# Altium PCB RS-485-USB.PcbDoc
Units mil, origin at the board's own origin, x right, y up, seen from the top; angles counter-clockwise.
Board outline 1275 x 1345 mil, 2 copper layers (Top Layer, Bottom Layer); 21 components, 30 nets, 140 pads, 48 vias.
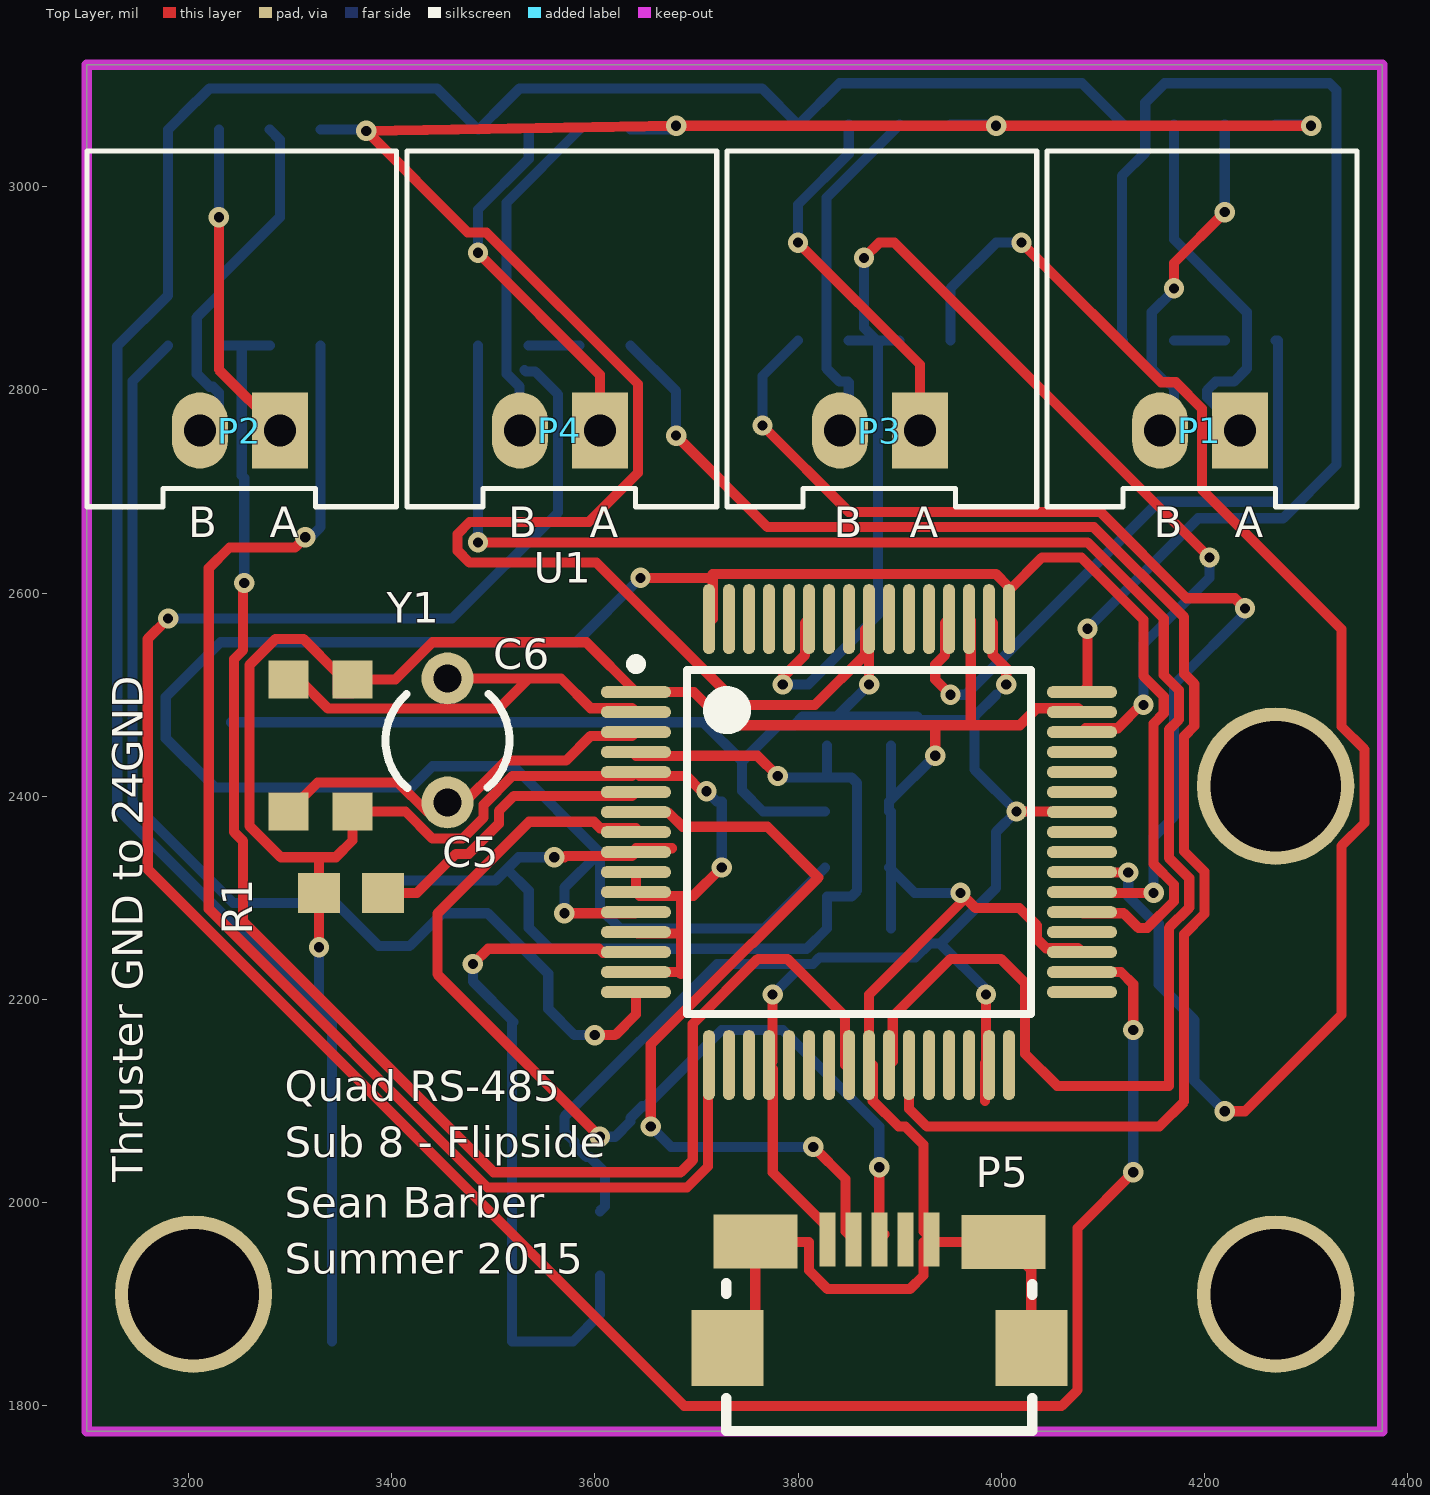
[diagram p0: Top Layer view]
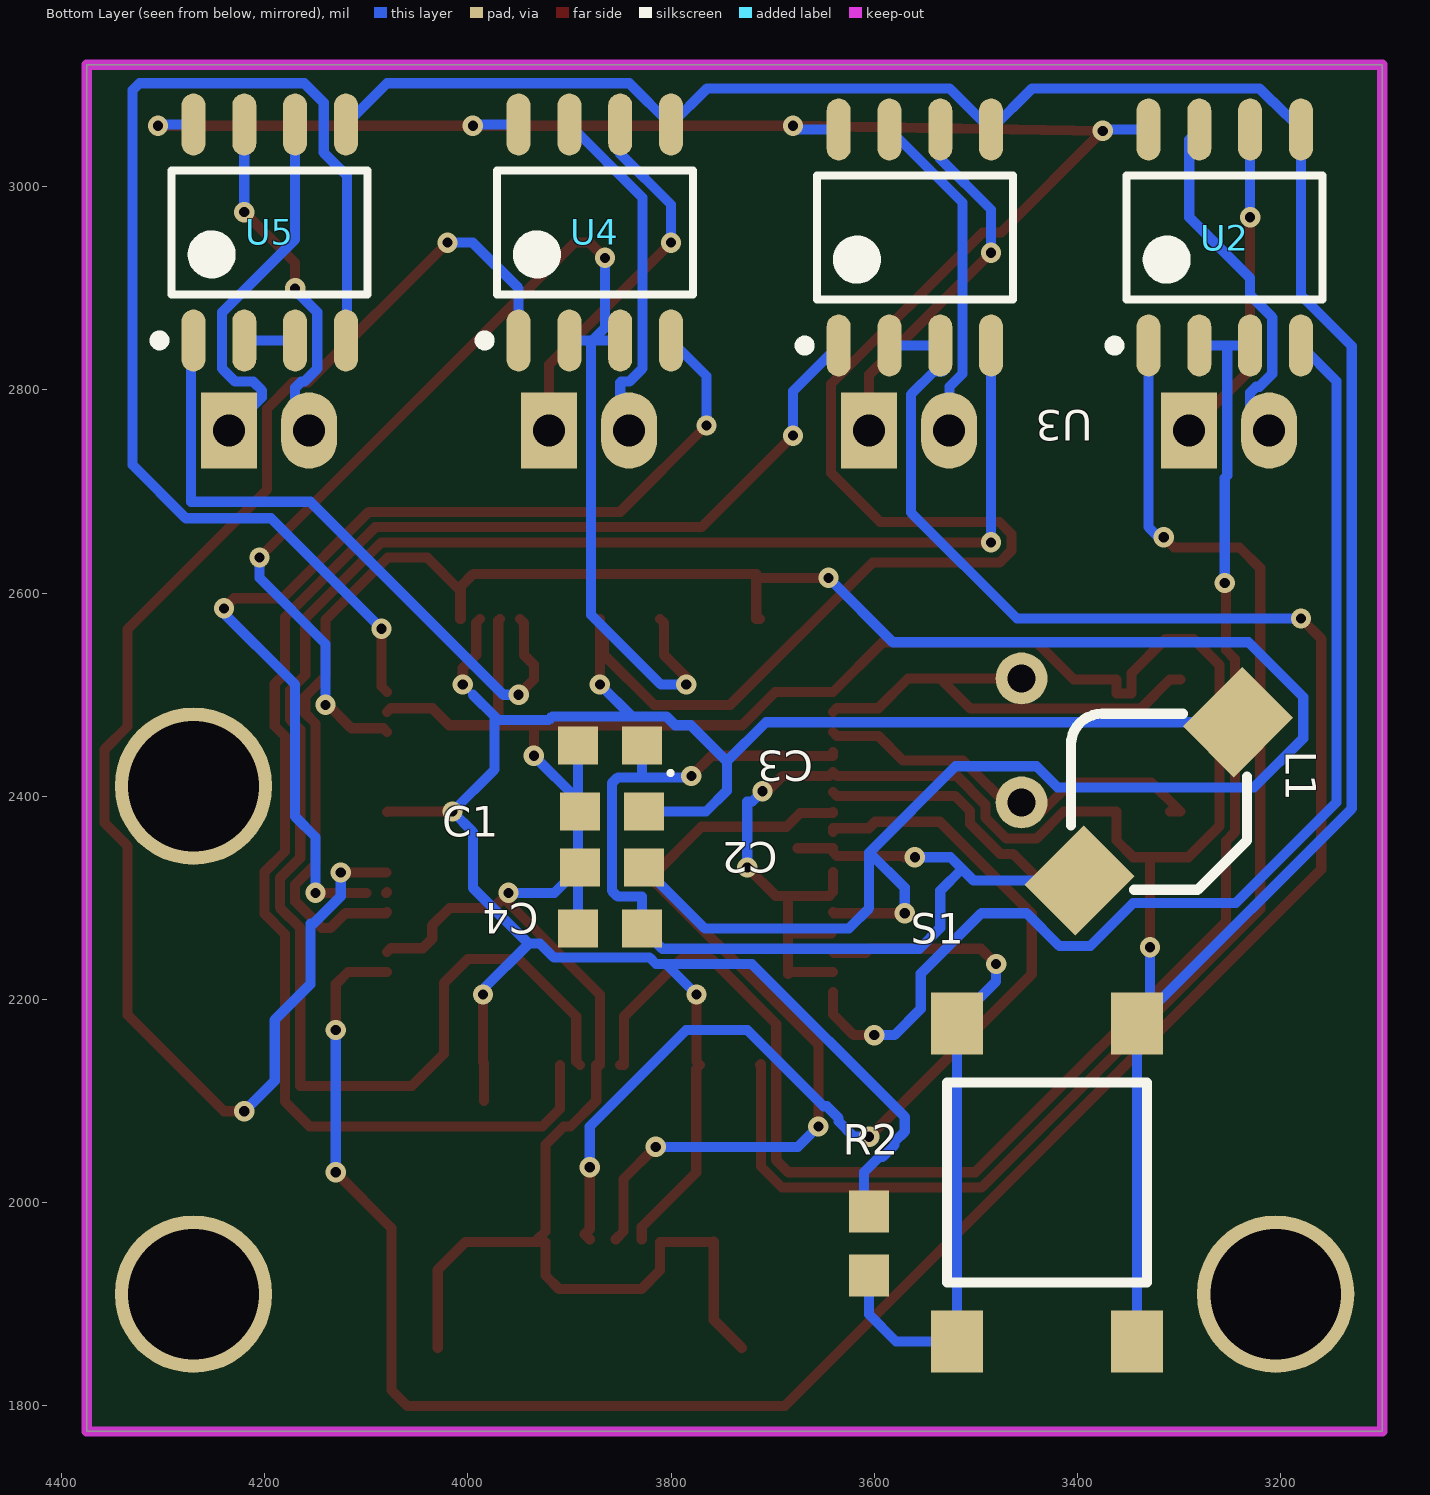
[diagram p1: Bottom Layer view, seen from below]
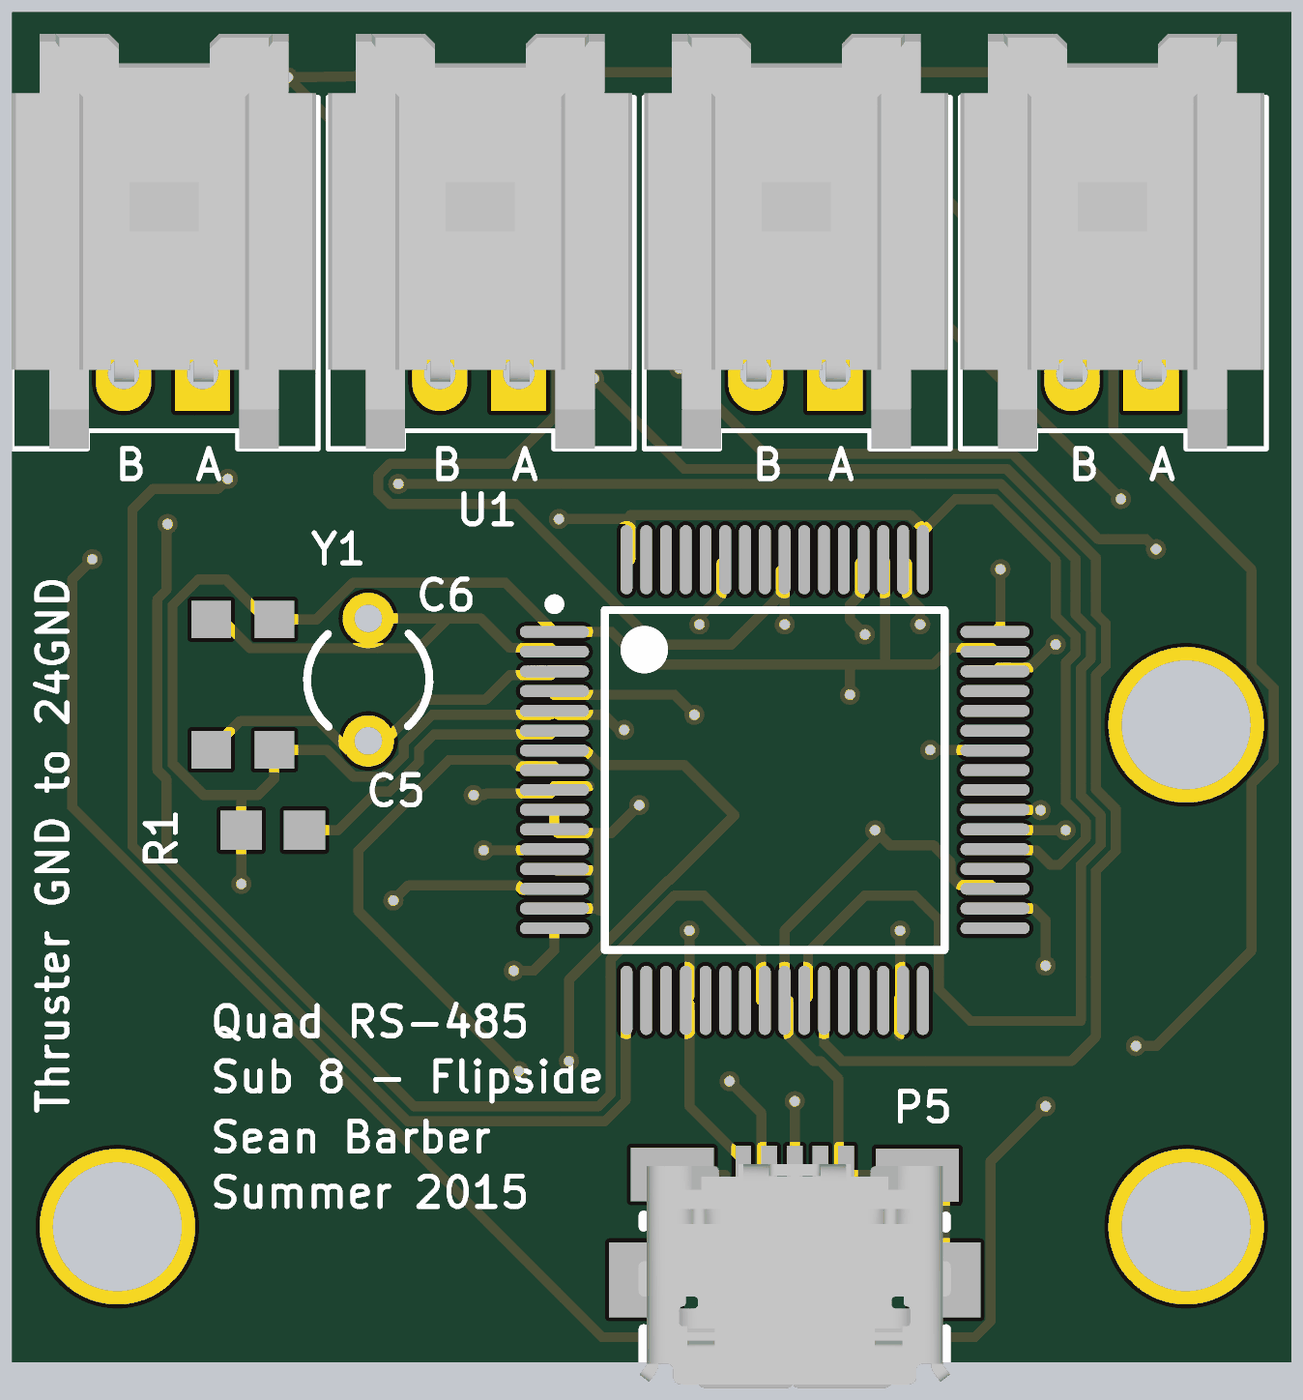
[diagram p2: 3D render of the assembled board from above, using the file's embedded part models]

## Layer stack, top to bottom
Top Solder: solder mask 0.4, Solder Resist, Dk 3.5
Top Layer: signal copper 1.4
Dielectric 1: dielectric 12.6, FR-4, Dk 4.8
Bottom Layer: signal copper 1.4
Bottom Solder: solder mask 0.4, Solder Resist, Dk 3.5

## Board outline
3100,1775 3100,3120 4375,3120 4375,1775

## Design rules (kind name [scope] priority, off if disabled: settings)
Clearance [All] p1: gap=5
MinimumSolderMaskSliver [All] p1: minsoldermaskwidth=1
PolygonConnect [All] p1: connectstyle=Relief reliefconductorwidth=10 reliefentries=4 polygonreliefangle="90 Angle" airgapwidth=10
RoutingVias [All] p1: holewidth=28 width=50 viastyle="Through Hole" minholewidth=28 minwidth=50 maxholewidth=28 maxwidth=50
SilkToSolderMaskClearance [IsPad] p1: minsilkscreentomaskgap=3 clearancetoexposedcopper=TRUE
SolderMaskExpansion [All] p1: expansion=4
Width [All] p1: maxlimit=10 minlimit=10 preferedwidth=10
28 further rules are at their usual default settings.

## Components (designator, comment, footprint, x,y, rotation, side; value= is the part's Value field where it differs from the comment)
C1 "Cap" CAPC0603 3858.19,2385 r180 bottom
C2 "Cap" CAPC0603 3858.19,2330 r180 bottom
C3 "CapPol" CAPP0603 3860,2450 r0 bottom
C4 "Cap" CAPC0603 3860,2270 r180 bottom
C5 "Cap" CAPC0603 3330,2385 r0 top
C6 "Cap" CAPC0603 3330,2515 r0 top
L1 "Inductor" CDPH4D19F 3320,2395 r270 bottom
P1 "2-pin Horz Sherlock" MOLEX-HDR-1X2-SHERLOCK-HORZ 4235,2760 r0 top
P2 "2-pin Horz Sherlock" MOLEX-HDR-1X2-SHERLOCK-HORZ 3290,2760 r0 top
P3 "2-pin Horz Sherlock" MOLEX-HDR-1X2-SHERLOCK-HORZ 3920,2760 r0 top
P4 "2-pin Horz Sherlock" MOLEX-HDR-1X2-SHERLOCK-HORZ 3605,2760 r0 top
P5 "USB Micro" 10118192-0001LF 3880,1985 r0 top
R1 "Res" RES0603 3360,2305 r0 top
R2 "Res" RES0603 3605,1960 r270 bottom
S1 "Button" PTS645xxxxSMTR92 3430,2020 r270 bottom
U1 "FT4232H" FT4232HL 3860,2355 r0 top
U2 "SP3485" SP3485 3255,2950 r90 bottom
U3 "SP3485" SP3485 3560,2950 r90 bottom
U4 "SP3485" SP3485 3875,2955 r90 bottom
U5 "SP3485" SP3485 4195,2955 r90 bottom
Y1 "12MHz" R38 3455,2455 r0 top

## Footprints (in the part's own frame and the unit in brackets; to place one, negate y for a bottom-side part, rotate by r counter-clockwise, add the part's x,y. Pads: shape width x height; smd on the part's side, far side on the other; paste and mask are expansions set on the pad)
10118192-0001LF [mm] "USB Micro-B Recepticle"
  rect 0.4x1.35 smd: 1(-1.3,-0.533) 2(-0.65,-0.533) 3(0,-0.533) 4(0.65,-0.533) 5(1.3,-0.533)
  rect 1.8x1.9 smd: SHD(-3.8,-3.248) SHD(3.8,-3.248)
  rect 2.1x1.35 smd: SHD(-3.1,-0.584) SHD(3.1,-0.598)
  silkscreen extent -3.82,-5.33 3.82,-1.63, body extent -3.96,-5.98 3.96,-0.32, height 3.09
CAPC0603 [mm] "Chip Capacitor, 2-Leads, Body 1.60x0.80mm, IPC Medium Density"
  rect 1x0.95 smd: 1(-0.8,0) 2(0.8,0)
  body extent -0.88,-0.48 0.87,0.48, height 0.8
CAPP0603 [mm] "Chip Capacitor, 2-Leads, Body 1.60x0.80mm, IPC Medium Density"
  rect 1x0.95 smd: 1(-0.8,0) 2(0.8,0)
  silkscreen extent -1.56,0.64 -1.46,0.74, body extent -0.88,-0.48 0.87,0.48, height 0.8
CDPH4D19F [mm] "SMD Power Inductor"
  rect 1.8x2.1 smd rot 45: 1(-1.98,1.98) 2(1.98,-1.98)
  silkscreen extent -2.19,-2.19 2.21,2.21, body extent -2.45,-2.45 2.45,2.45, height 2
FT4232HL [mm] "TSQFP, 64-Leads, Body 10.00x10.00mm, Pitch 0.50mm, IPC Medium Density"
  oval 1.75x0.3 smd: 1(-5.575,3.75) 2(-5.575,3.25) 3(-5.575,2.75) 4(-5.575,2.25) 5(-5.575,1.75) 6(-5.575,1.25) 7(-5.575,0.75) 8(-5.575,0.25) 9(-5.575,-0.25) 10(-5.575,-0.75) 11(-5.575,-1.25) 12(-5.575,-1.75) 13(-5.575,-2.25) 14(-5.575,-2.75) 15(-5.575,-3.25) 16(-5.575,-3.75) 33(5.575,-3.75) 34(5.575,-3.25) 35(5.575,-2.75) 36(5.575,-2.25) 37(5.575,-1.75) 38(5.575,-1.25) 39(5.575,-0.75) 40(5.575,-0.25) 41(5.575,0.25) 42(5.575,0.75) 43(5.575,1.25) 44(5.575,1.75) 45(5.575,2.25) 46(5.575,2.75) 47(5.575,3.25) 48(5.575,3.75)
  oval 0.3x1.75 smd: 17(-3.75,-5.575) 18(-3.25,-5.575) 19(-2.75,-5.575) 20(-2.25,-5.575) 21(-1.75,-5.575) 22(-1.25,-5.575) 23(-0.75,-5.575) 24(-0.25,-5.575) 25(0.25,-5.575) 26(0.75,-5.575) 27(1.25,-5.575) 28(1.75,-5.575) 29(2.25,-5.575) 30(2.75,-5.575) 31(3.25,-5.575) 32(3.75,-5.575) 49(3.75,5.575) 50(3.25,5.575) 51(2.75,5.575) 52(2.25,5.575) 53(1.75,5.575) 54(1.25,5.575) 55(0.75,5.575) 56(0.25,5.575) 57(-0.25,5.575) 58(-0.75,5.575) 59(-1.25,5.575) 60(-1.75,5.575) 61(-2.25,5.575) 62(-2.75,5.575) 63(-3.25,5.575) 64(-3.75,5.575)
  silkscreen extent -5.7,-4.3 4.3,4.57, body extent -5,-5 5,5, height 1.6
MOLEX-HDR-1X2-SHERLOCK-HORZ [mm]
  rect 1.397x1.905 hole 0.8: 1(0,0)
  oval 1.397x1.905 hole 0.8: 2(-2,0)
  silkscreen extent -4.83,-1.91 2.92,6.98, body extent -4.83,-1.91 2.87,8.59, height 5.54
PTS645xxxxSMTR92 [mm] "PTS645 Series SMT 6 mm Tactile Switch"
  rect 1.555x1.3 smd: A(-3.975,2.25) A(3.975,2.25) B(-3.975,-2.25) B(3.975,-2.25)
  silkscreen extent -2.5,-2.5 2.5,2.5, body extent -3,-3 3,3, height 4.5
R38 [mm] "Crystal, Thru-Hole; 2 Leads; Body 3.1 x 8.2 mm (Dia.xH)"
  round 1.3 hole 0.7: 1(0,1.55) 2(0,-1.55)
  silkscreen extent -1.55,-1.19 1.55,1.17
RES0603 [mm] "Chip Resistor, 2-Leads, Body 1.60x0.80mm, IPC Medium Density"
  rect 1.05x1 smd: 1(-0.8,0) 2(0.8,0)
  body extent -0.88,-0.48 0.87,0.47, height 0.8
SP3485 [mm] "SOIC, 8-Leads, Body 4.90x3.90mm, Pitch 1.27mm, IPC Medium Density"
  oval 1.55x0.6 smd: 1(-2.7,1.905) 2(-2.7,0.635) 3(-2.7,-0.635) 4(-2.7,-1.905) 5(2.7,-1.905) 6(2.7,-0.635) 7(2.7,0.635) 8(2.7,1.905)
  silkscreen extent -2.82,-2.45 1.55,2.88, body extent -1.95,-2.45 1.95,2.45, height 1.75

## Part data
P1 P2 P3 P4: library part MOLEX-HDR-1x2-SHERLOCK_RA, "Header, Molex, 2mm Pitch Sherlock Header, Single Row, Horizontal, 2 Circuits, Length 3.3mm,  0353630260"
P5: "USB Mini B Metal Shield SMT"
S1: "SPST Button"
U1: "Quad High Speed USB to Multipurpose UART/MPSSE"
U2 U3 U4 U5: "IC TXRX RS485 HALF DUPLEX 8NSOIC"
Y1: library part XTAL, "Crystal Oscillator"

## Free pads (board coordinates)
  round 155 hole 128.5: 0(3205,1910) 0(4270,1910) 0(4270,2410)

## Via types
v1: diameter 20, hole 10, Top Layer to Bottom Layer, tented both sides, 48 vias

## Nets (pads, with @x,y where several pads share a name; then routed paths per layer and width w, separated by ;. In a path a pad name is that pad's centre, name@x,y a point inside that pad or via, vN(x,y) a via of type N, cw(c..) or ccw(c..) an arc to the next point about the centre after c; other vN are vias at no path point)
3V3: C1.2 L1.1 P5.1 R2.1 U1.20 U1.31 U1.42 U1.50 U1.56 U2.8 U3.8 U4.8 U5.8 | length 4750.5
  Top Layer w10: v1(3775,2205) 3775,2139.09 U1.20 3775.2,2131.73 3775.2,2029.8 3828.82,1976.18 P5.1 ; v1(3870,2510) U1.56@3870,2574.33 ; U1.56@3870,2560 3866.06,2563.94 3866.06,2539.36 3816.71,2490 3741.72,2490 3601.72,2630 3476.72,2630 3465,2641.72 3465,2658.28 3476.72,2670 3594.14,2670 3642.5,2718.36 3642.5,2805.78 3493.28,2955 3475,2955 v1(3375,3055) v1(3680,3060) v1@4300,3060 ; 3984.17,2100.38 3984.17,2137.64 3985,2138.46 v1(3985,2205) ; U1.50 3991.73,2570.71 3991.73,2539.36 4005,2526.09 v1(4005,2510) ; v1(4015,2385) 4079.02,2385 U1.42
  Bottom Layer w10: L1.1 3706.55,2472.95 3745,2434.5 ; U2.8 v1@3371.3,3056.3 ; R2.1 3610,1996.5 3610,2030 3595,2045 3591.72,2045 3580,2056.72 3580,2060 3570,2070 3570,2084.5 3720.5,2235 3805,2235 ; U3.8 v1@3678.7,3056.3 ; v1(3775,2205) 3805,2235 ; C1.2 3765.5,2385 3745,2405.5 3745,2434.5 ; v1(3870,2510) 3838.7,2478.7 ; U4.8 v1@3993.7,3061.3 ; v1(3985,2205) 3985,2210 3940,2255 ; 3995,2500 3973.7,2478.7 ; U5.8 v1@4303.7,3061.3 ; 3745,2434.5 3780.5,2470 3795.98,2470 3804.68,2478.7 3838.7,2478.7 ; 3805,2235 3814.72,2235 3821.02,2241.3 3915.32,2241.3 3929.02,2255 3940,2255 ; 3838.7,2478.7 3916.8,2478.7 3920.5,2475 3970,2475 3973.7,2478.7 ; 3940,2255 3995,2310 3995,2365 v1(4015,2385) 3973.7,2426.3 3973.7,2478.7
  other v1: 3995,3060 4305,3060
GND: C1.1 C2.1 C3.2 C4.1 C5.2 C6.2 P5.5 P5.SHD R1.1 S1.A U1.1 U1.5 U1.10 U1.11 U1.13 U1.15 U1.25 U1.35 U1.47 U1.51 U2.5 U3.5 U4.5 U5.5 | length 6072.6
  Top Layer w10: v1(3328.5,2251.5) R1.1 3328.5,2340 ; U1.15 3682.95,2227.05 3684.96,2225.04 3684.96,2265.04 ; U1.10 U1.11 3644.29,2302.01 3684.96,2302.01 ; U1.13@3641.89,2265.04 3684.96,2265.04 ; v1(3710,2405) 3705,2405 3689.88,2420.12 3644.29,2420.12 U1.5 3636.73,2420.12 3518.9,2420.12 3490.59,2391.8 3490.59,2379.23 3469.74,2358.39 3440.26,2358.39 3413.64,2385 C5.2 3361.5,2356.5 3345,2340 3290.98,2340 3260,2370.98 3260,2529.02 3285.98,2555 3313.02,2555 3346.81,2521.21 3346.81,2501.3 3361.5,2501.3 C6.2 3403.64,2515 3440.26,2551.61 3591.54,2551.61 U1.1 3697.36,2502.64 3730,2470 3968.27,2470 ; v1(3725,2330) 3697.01,2302.01 3684.96,2302.01 ; P5.SHD@3730.39,1857.11 3757.95,1884.67 3757.95,1962 3758.51,1961.44 3810.94,1961.44 3810.94,1933.28 3829.23,1915 3910,1915 3923.46,1928.46 3923.46,1961.44 4002.05,1961.44 4029.61,1933.88 P5.SHD@4029.61,1857.11 ; P5.5 3923.46,1971.72 3923.46,2057.11 3905.57,2075 3899,2075 3873.62,2100.38 3873.62,2135.51 U1.25 3869.84,2204.84 3960,2295 v1(3960,2305) 3975,2290 4018.05,2290 4035.04,2273.01 4035.04,2259.83 4044.36,2250.51 4075.71,2250.51 U1.35 ; v1(3935,2440) 3935,2470 ; U1.51 3970,2572.76 3970,2471.73 3968.27,2470 ; U1.47 4075.71,2486.73 4035.04,2486.73 4018.31,2470 3968.27,2470 ; 3684.96,2265.04 3684.96,2302.01
  Bottom Layer w10: v1(3328.5,2251.5) S1.A@3328.5,2189.41 ; S1.A@3341.42,1863.5 3341.42,2176.5 S1.A@3328.5,2189.41 ; v1(3710,2405) 3720,2395 3725,2395 v1(3725,2330) ; C2.1 3914.69,2305 v1(3960,2305) ; C1.1 3889.69,2394.69 C1.1@3891.5,2396.5 ; C4.1 C1.1@3891.5,2385 ; C3.2 C1.1@3891.5,2396.5 ; v1(3935,2440) C1.1@3891.5,2396.5 ; U5.5 4079.49,3101.81 3840.97,3101.81 3800.45,3061.3 U4.5 3764.49,3096.81 3525.97,3096.81 3513.19,3084.04 3485.45,3056.3 U3.5 3444.49,3096.81 3220.97,3096.81 3208.19,3084.04 3207.74,3084.04 U2.5 3180,2893.25 3130,2843.25 3130,2387.92 S1.A@3328.5,2189.41
MOLEX1-1: P2.1 U2.6 | length 321.2
  Top Layer w10: v1(3230,2970) 3230,2820 P2.1
  Bottom Layer w10: v1(3230,2970) U2.6
MOLEX1-2: P2.2 U2.7 | length 352.9
  Bottom Layer w10: P2.2 3230,2778.74 3230,2797.22 3224.03,2803.19 3220.97,2803.19 3208.19,2815.96 3208.19,2871.44 3230,2893.25 3230,2910 3290,2970 3290,3046.3 U2.7
MOLEX2-1: P4.1 U3.6 | length 369.3
  Top Layer w10: v1(3485,2935) 3605,2815 P4.1
  Bottom Layer w10: v1(3485,2935) 3485,2977.51 3535,3027.51 U3.6 ; P4.1 P4.1@3606.81,2761.81
MOLEX2-2: P4.2 U3.7 | length 343.4
  Bottom Layer w10: P4.2@3525.97,2760.29 3525.97,2803.19 3513.19,2815.96 3513.19,2984.49 U3.7 ; P4.2 P4.2@3535,2768.74
MOLEX3-1: P3.1 U4.6 | length 374.3
  Top Layer w10: v1(3800,2945) 3920,2825 P3.1
  Bottom Layer w10: v1(3800,2945) 3800,2982.51 3850,3032.51 U4.6 ; P3.1 P3.1@3921.81,2761.81
MOLEX3-2: P3.2 U4.7 | length 348.4
  Bottom Layer w10: P3.2 3850,2768.74 3850,2807.22 3849.03,2808.19 3840.97,2808.19 3828.19,2820.96 3828.19,2989.49 U4.7
MOLEX4-1: P1.1 U5.6 | length 380.9
  Bottom Layer w10: U5.6 4170,2948.25 4241.81,2876.44 4241.81,2820.96 4229.03,2808.19 4211.12,2808.19 4202.5,2799.57 4202.5,2792.5 P1.1 P1.1@4241.81,2766.81
MOLEX4-2: P1.2 U5.7 | length 345.8
  Top Layer w10: v1(4170,2900) 4170,2925 v1(4220,2975)
  Bottom Layer w10: P1.2 4170,2773.74 4170,2802.22 4164.03,2808.19 4160.97,2808.19 4148.19,2820.96 4148.19,2876.44 v1@4170,2898.25 ; v1(4220,2975) U5.7
NetC2_2: C2.2 U1.12 U1.37 U1.49 U1.64 | length 2551.1
  Top Layer w10: v1(3570,2285) 3639.41,2285 U1.12 ; v1(3645,2615) 3712.21,2615 ; U1.64 3716.14,2574.49 3716.14,2618.94 3994.54,2618.94 4006.73,2606.75 4006.73,2574.49 U1.49 4007.64,2602.64 4040,2635 4078.79,2635 4140,2573.79 4140,2518.28 4160,2498.28 4160,2481.72 4150,2471.72 4150,2333.28 4170,2313.28 4170,2296.72 4143.79,2270.5 4135,2270.5 4120.5,2285 4080.59,2285 U1.37
  Bottom Layer w10: v1(3570,2285) 3570,2310 3604.75,2344.75 ; v1(3645,2615) 3581.61,2551.61 3231.61,2551.61 3177.77,2497.77 3177.77,2457.23 3226.34,2408.66 3419.35,2408.66 3440.26,2429.57 3519.93,2429.57 3605,2344.5 3605,2290 3625,2270 3766.69,2270 C2.2
NetC3_1: C3.1 C4.2 L1.2 U1.4 U1.9 | length 1178.4
  Top Layer w10: 3570,2340 3571.38,2341.38 3636.73,2341.38 U1.9 U1.9@3640.51,2348.94 ; U1.4 U1.4@3640.51,2439.8 ; v1(3780,2420) 3760,2440 3690.5,2440 3690.31,2439.8 ; U1.9@3640.51,2348.94 3675.64,2348.94 U1.9@3640.51,2348.94 ; U1.4@3640.51,2439.8 3690.31,2439.8 ; U1.4@3640.51,2439.8 3690.31,2439.8
  Bottom Layer w10: L1.2 3502.05,2317.05 3525,2340 v1(3560,2340) ; 3513.53,2328.53 3535,2307.05 3535,2270.5 3555.5,2250 3584.5,2250 3808.5,2250 C4.2 3828.5,2301.3 3852.33,2301.3 3858.19,2307.16 3858.19,2412.84 3852.33,2418.7 3828.5,2418.7 ; v1(3780,2420) 3781.3,2418.7 3828.5,2418.7 ; C3.1 3828.5,2418.7
NetC5_1: C5.1 U1.3 Y1.2 | length 507.3
  Top Layer w10: C5.1@3308.97,2385 C5.1 3327.2,2413.7 3406.16,2413.7 Y1.2@3434.86,2385 ; U1.3 3636.73,2459.49 3596.06,2459.49 3571.69,2435.12 3512.69,2435.12 ; Y1.2@3434.86,2385 Y1.2@3462.57,2385 ; Y1.2@3434.86,2385 3455,2385 Y1.2@3462.57,2385 ; Y1.2@3462.57,2385 3512.69,2435.12 ; Y1.2@3462.57,2385 3463.28,2385.7 3512.69,2435.12
NetC6_1: C6.1 U1.2 Y1.1 | length 627.5
  Top Layer w10: C6.1 3308.97,2515 3337.67,2486.3 ; Y1.1 3535,2516.02 ; U1.2 3636.73,2486.73 3596.06,2486.73 3566.77,2516.02 3535,2516.02 ; 3337.67,2486.3 3505.28,2486.3 ; 3337.67,2486.3 3505.28,2486.3 ; 3505.28,2486.3 3535,2516.02
NetP5_2: P5.2 U1.7 | length 796.1
  Top Layer w10: U1.7 3640.51,2383.62 3672.77,2383.62 3686.39,2370 3770,2370 3820,2320 3755,2255 3754.29,2255 3655,2155.71 v1(3655,2075) ; v1(3815,2055) 3846.69,2023.31 3846.69,1971.72 P5.2
  Bottom Layer w10: v1(3655,2075) 3675,2055 v1(3815,2055)
NetP5_3: P5.3 U1.8 | length 1000.1
  Top Layer w10: v1(3605,2065) 3445,2225 3445,2284.5 3535.5,2375 3599,2375 3605.38,2368.62 3640.51,2368.62 U1.8 ; P5.3 3885,1969 3880,1974 v1(3880,2035)
  Bottom Layer w10: v1(3605,2065) 3620,2065 3635,2080 3635,2083.28 3646.72,2095 3650,2095 3725,2170 3785,2170 3880,2075 v1(3880,2035)
NetR1_2: R1.2 U1.6 | length 297.5
  Top Layer w10: R1.2 3425,2305 3463.39,2343.39 3475.96,2343.39 3505.59,2373.02 3505.59,2385.59 3520.43,2400.43 3636.73,2400.43 U1.6
RESET: R2.2 S1.B U1.14 | length 693.4
  Top Layer w10: v1(3480,2235) 3495,2250 3604.08,2250 3608.25,2245.83 3639.61,2245.83 U1.14
  Bottom Layer w10: v1(3480,2235) 3480,2217.91 3520,2177.91 3518.58,2176.5 3518.58,1863.5 3578.5,1863.5 3605,1890 R2.2
RX1: U1.17 U2.1 | length 1356.3
  Top Layer w10: v1(3315,2655) 3305,2645 3240.5,2645 3220,2624.5 3220,2289.29 3494.29,2015 3690.71,2015 3711.46,2035.75 3711.46,2136.42 U1.17
  Bottom Layer w10: v1(3315,2655) 3320,2655 3330,2665 U2.1
RX2: U1.27 U3.1 | length 1514.1
  Top Layer w10: v1(3680,2755) 3770,2665 4091.21,2665 4180,2576.21 4180,2520.71 4190,2510.71 4190,2469.29 4180,2459.29 4180,2345.71 4200,2325.71 4200,2284.29 4180,2264.29 4180,2099.5 4155.5,2075 3926.79,2075 3909.21,2092.58 U1.27
  Bottom Layer w10: U3.1 3680,2798.7 v1(3680,2755)
RX3: U1.39 U4.1 | length 1533.1
  Top Layer w10: v1(4020,2945) 4157.5,2807.5 4171.79,2807.5 4197.5,2781.79 4197.5,2702 4335,2564.5 4335,2468.74 4357.5,2446.24 4357.5,2373.76 4335,2351.26 4335,2185 4240,2090 v1(4220,2090) ; U1.39@4079.96,2325 v1(4125,2325)
  Bottom Layer w10: U4.1 3950,2900 3995,2945 v1(4020,2945) ; v1(4125,2325) 4125,2301.72 4151.72,2275 4155,2275 4155,2215 4190,2180 4190,2120 v1(4220,2090)
RX4: U1.52 U5.1 | length 646.2
  Top Layer w10: U1.52 3944.8,2570.71 3944.8,2539.36 3935,2529.55 3935,2515 v1(3950,2500)
  Bottom Layer w10: v1(3950,2500) 3965,2500 4155,2690 4272.5,2690 ; U5.1 4272.5,2848.7 4272.5,2692.5
TX1: U1.16 U2.4 | length 1131.7
  Top Layer w10: v1(3600,2165) 3620,2165 3640.51,2185.51 U1.16
  Bottom Layer w10: U2.4 3145,2808.7 3145,2394.13 3244.13,2295 3345,2295 3387.23,2252.77 3417.77,2252.77 3450,2285 3494.5,2285 3554.17,2225.32 3554.17,2190.83 3580,2165 v1(3600,2165)
TX2: U1.26 U3.4 | length 1823.7
  Top Layer w10: v1(3485,2650) 4085,2650 4160,2575 4160,2519.5 4175,2504.5 4175,2475.5 4165,2465.5 4165,2339.5 4185,2319.5 4185,2290.5 4165,2270.5 4165,2115 4055,2115 4023.54,2146.46 4023.54,2215.95 3999.5,2240 3950.05,2240 3893.31,2183.26 3893.31,2139.29 U1.26
  Bottom Layer w10: v1(3485,2650) U3.4
TX3: U1.38 U4.4 | length 1023.2
  Top Layer w10: v1(3765,2765) 3850,2680 4097.43,2680 4182.43,2595 4230,2595 v1(4240,2585) ; U1.38 U1.38@4080.28,2305 ; U1.38@4100,2305 v1(4150,2305)
  Bottom Layer w10: v1(3765,2765) 3765,2813.7 U4.4 ; v1(4150,2305) 4150,2360 4170,2380 4170,2510 4245,2585 v1(4240,2585)
TX4: U1.48 U5.4 | length 1190.6
  Top Layer w10: U1.48 4085,2508.15 v1(4085,2565)
  Bottom Layer w10: v1(4085,2565) 4193.79,2673.79 4277.5,2673.79 4330,2726.29 4330,3095 4323.19,3101.81 4160.97,3101.81 4141.81,3082.66 4141.81,3033.56 4118.76,3010.51 4118.76,2847.46 U5.4
TXDEN1: U1.24 U2.2 U2.3 | length 1562
  Top Layer w10: v1(3255,2610) 3253.82,2608.82 3253.82,2544.06 3245,2535.24 3245,2364.76 3253.82,2355.94 3253.82,2276.68 3500.5,2030 3684.5,2030 3696.46,2041.96 3696.46,2175.95 3760.5,2240 3789.5,2240 3846.38,2183.12 3846.38,2135.51 U1.24
  Bottom Layer w10: U2.3 U2.2 ; v1(3255,2610) 3255,2713.36 3252.5,2715.86 3252.5,2841.2 3255,2843.7
TXDEN2: U1.34 U3.2 U3.3 | length 2509.3
  Top Layer w10: v1(3180,2575) 3160,2555 3160,2328.08 3688.08,1800 4059.47,1800 4075.04,1815.57 4075.04,1975.04 v1(4130,2030) ; U1.34 4117.95,2227.05 4130,2215 v1(4130,2170)
  Bottom Layer w10: v1(3180,2575) 3459.5,2575 3563.76,2679.26 3563.76,2795.64 3541.21,2818.19 3532.18,2818.19 U3.3@3530.83,2819.53 ; U3.3 U3.2 ; v1(4130,2030) v1(4130,2170)
TXDEN3: U1.46 U1.59 U4.2 U4.3 | length 1323.5
  Top Layer w10: v1(3785,2510) 3785,2517.35 3807.01,2539.36 3807.01,2570.71 U1.59 ; v1(3865,2930) 3880,2945 3895,2945 v1(4205,2635) ; U1.46 4083.27,2467.05 4114.62,2467.05 4137.57,2490 v1(4140,2490)
  Bottom Layer w10: v1(3785,2510) 3810,2510 3878.76,2578.76 3878.76,2844.94 3880,2846.18 3865,2861.18 v1(3865,2930) ; U4.3 U4.2 ; v1(4140,2490) 4140,2550 4205,2615 v1(4205,2635)
TXDEN4: U5.2 U5.3 | length 50
  Bottom Layer w10: U5.3 U5.2
pads on no net: P5.4 U1.18 U1.19 U1.21 U1.22 U1.23 U1.28 U1.29 U1.30 U1.32 U1.33 U1.36 U1.40 U1.41 U1.43 U1.44 U1.45 U1.53 U1.54 U1.55 U1.57 U1.58 U1.60 U1.61 U1.62 U1.63

## Keep-outs
Keep-Out Layer:
  the board outline again, w10

## Silkscreen, mask and mechanical layers (free items; w line width, h text height)
Top Overlay:
  text "B" at 3200,2655 h30
  text "A" at 3280,2655 h30
  text "B" at 3515,2655 h30
  text "A" at 3595,2655 h30
  text "B" at 3835,2655 h30
  text "A" at 3910,2655 h30
  text "B" at 4150,2655 h30
  text "A" at 4230,2655 h30
  text "Quad RS-485" at 3295,2100 h30
  text "Sub 8 - Flipside" at 3295,2045 h30
  text "Thruster GND to 24GND" at 3155,2020 h30 r90
  text "Sean Barber" at 3295,1985 h30
  text "Summer 2015" at 3295,1930 h30